# Altium PCB ROBOT_PCB.PcbDoc
Units mil, origin at the board's own origin, x right, y up, seen from the top; angles counter-clockwise.
Board outline 2089.97 x 2124.34 mil, 2 copper layers (Top Layer, Bottom Layer); 12 components, 14 nets, 101 pads, 0 vias.
Unrouted connection lines stored in the file: 3.
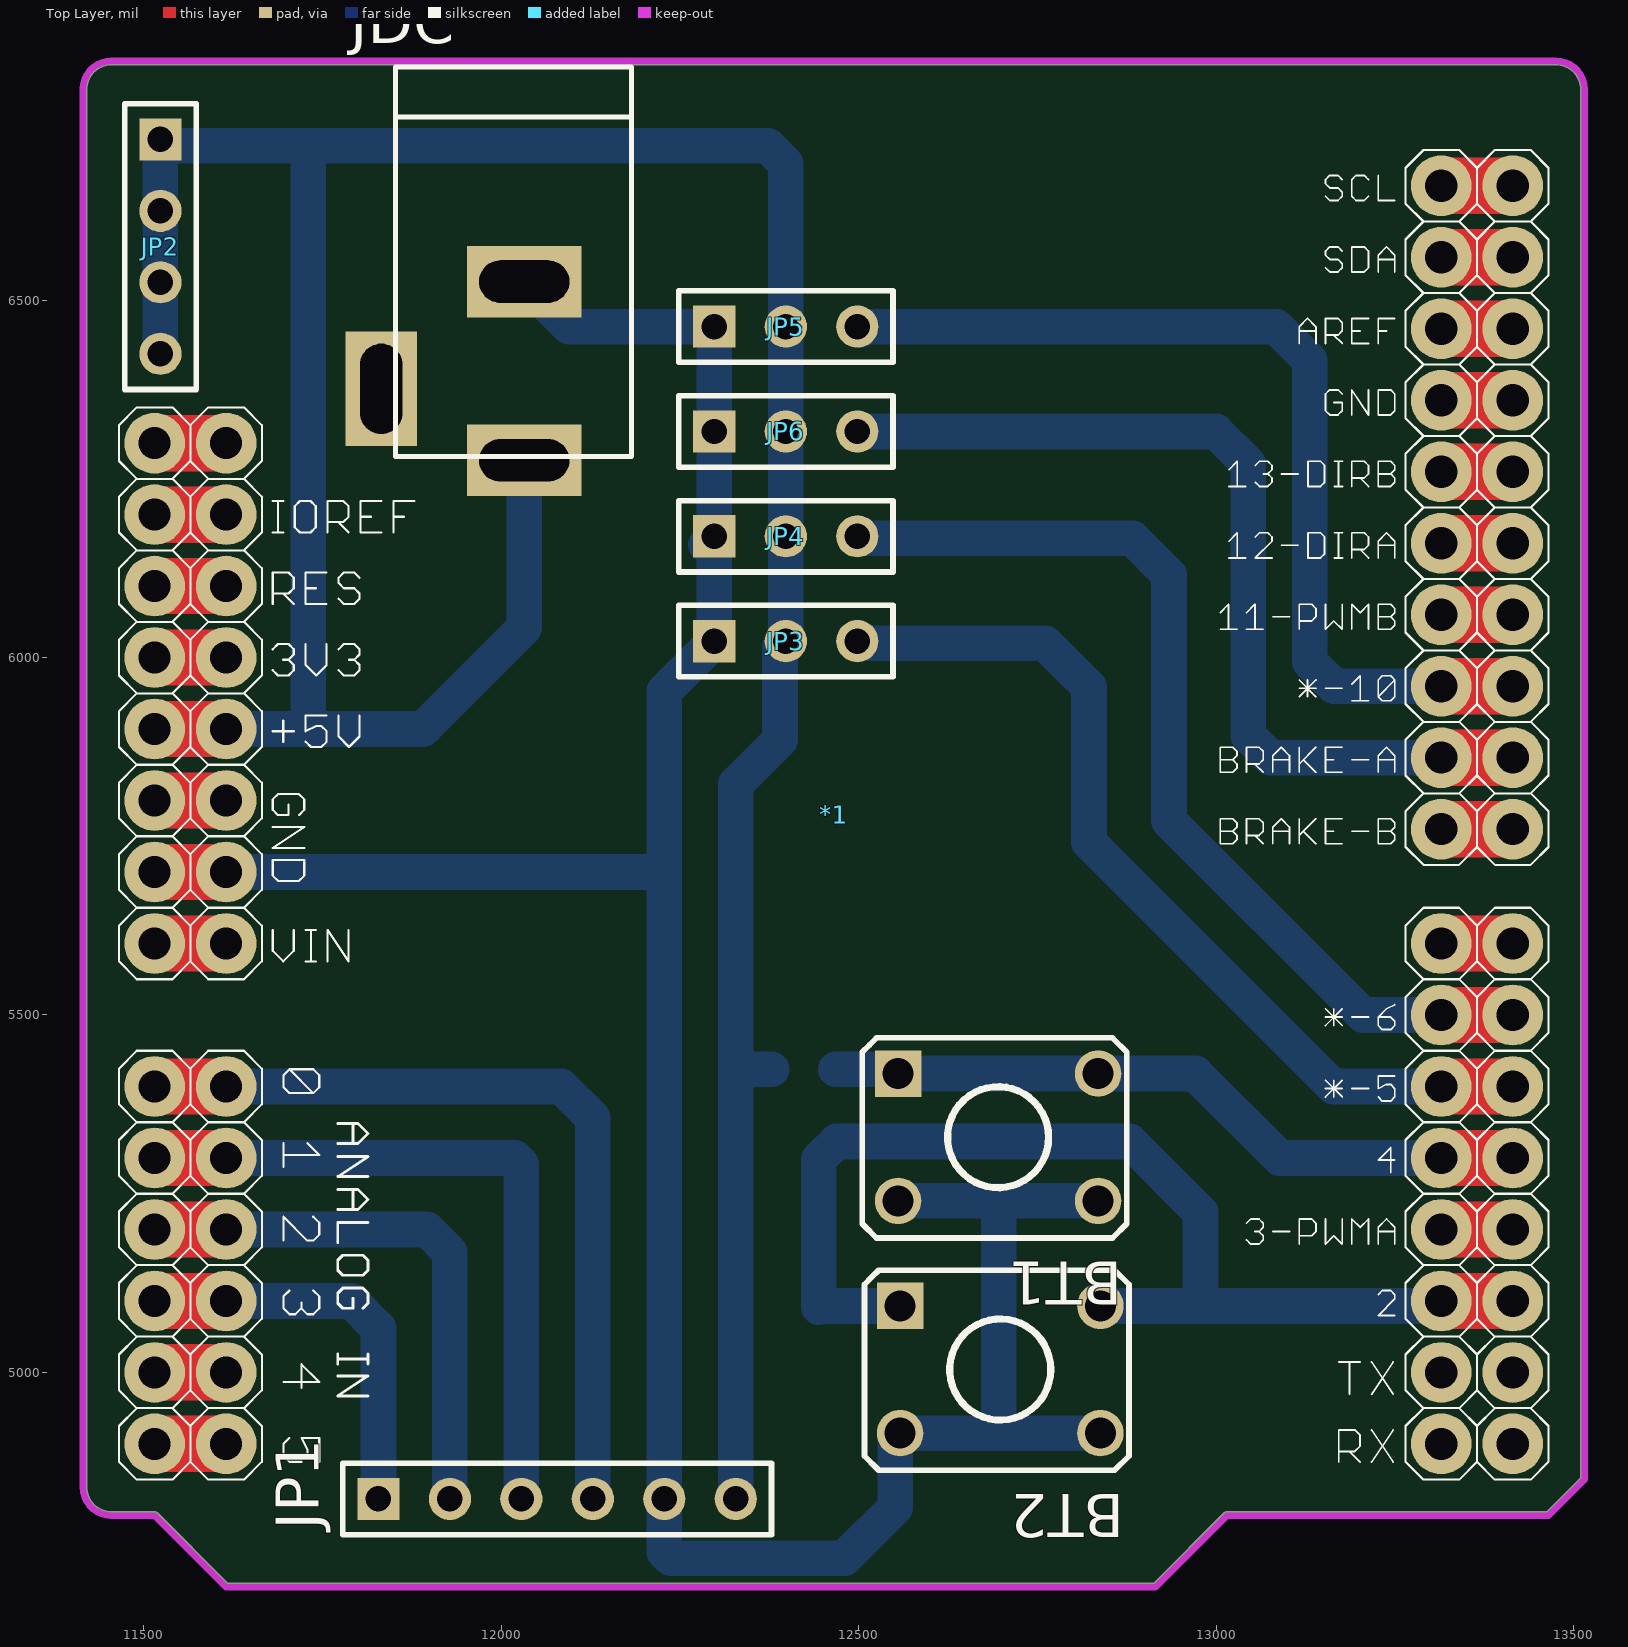
[diagram p0: Top Layer view]
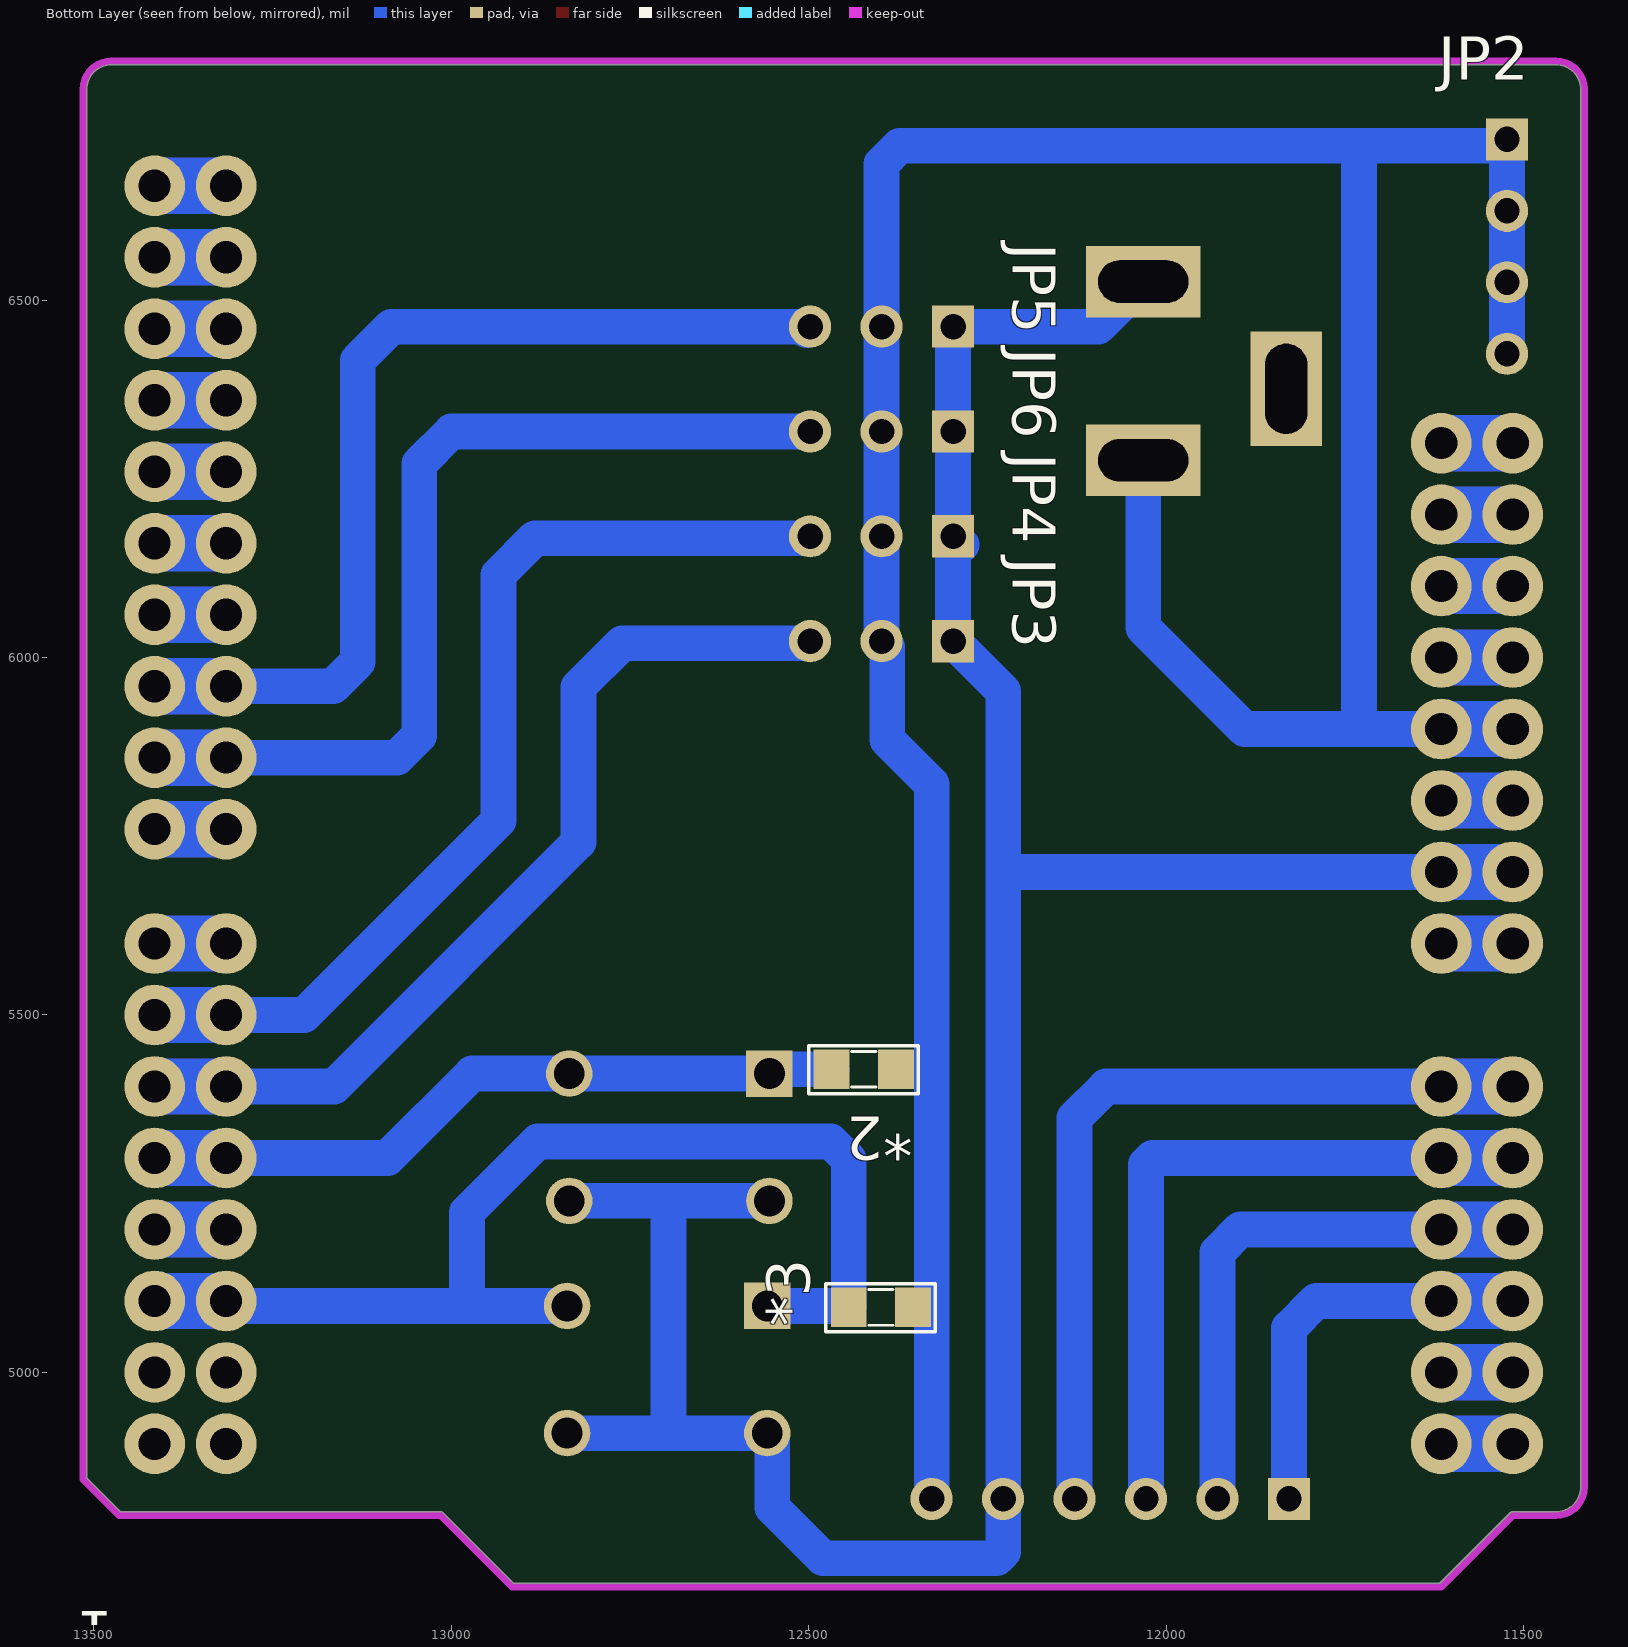
[diagram p1: Bottom Layer view, seen from below]

## Layer stack, top to bottom
Top Solder: solder mask 0.4, Solder Resist, Dk 3.5
Top Layer: signal copper 1.4
Dielectric 1: dielectric 12.6, FR-4, Dk 4.8
Bottom Layer: signal copper 1.4
Bottom Solder: solder mask 0.4, Solder Resist, Dk 3.5

## Board outline
11420.01,4839.37 ccw(c11454.37,4839.37) 11454.37,4805.02 11515,4805.02 cw(c11515,4800) 11518.56,4803.53 11518.55,4803.55 11617.08,4705.02 12912.92,4705.02 13011.45,4803.55 13011.44,4803.53 cw(c13015,4800) 13015,4805.02 13462.92,4805.02 13509.99,4852.08 13509.99,6795 ccw(c13475.63,6795) 13475.63,6829.36 11454.37,6829.36 ccw(c11454.37,6795) 11420.01,6795

## Design rules (kind name [scope] priority, off if disabled: settings)
Clearance [All] p1: gap=10 except(50: Arc-Poly Track-Poly SMDPad-Poly THPad-Poly Via-Poly Fill-Poly Poly-Poly)
PolygonConnect [All] p1: connectstyle=Relief reliefconductorwidth=10 reliefentries=4 polygonreliefangle="90 Angle" airgapwidth=10
RoomDefinition ROBOT_SCH [InComponentClass('ROBOT_SCH')] p1: confinementstyle=ConfineIn formatcopy=TRUE lockcomponents=FALSE outline 6780,1215 10035,1215 10035,3470 6780,3470
RoutingVias [All] p1: holewidth=28 width=50 viastyle="Through Hole" minholewidth=28 minwidth=50 maxholewidth=28 maxwidth=50
SolderMaskExpansion [All] p1: expansion=4
Width [All] p1: maxlimit=100 minlimit=10 preferedwidth=10
30 further rules are at their usual default settings.

## Components (designator, comment, footprint, x,y, rotation, side; value= is the part's Value field where it differs from the comment)
*1 "Arduino Uno" "ARDUINO UNO" 11515,4900 r0 top
*2 "4K7" "Tro SMD 0805" 12423,5424 r180 bottom
*3 "4K7" "Tro SMD 0805" 12399,5091 r180 bottom
BT1 "BUTTON 4P 6x6_MH" "BUTTON 4 PIN(6*6)" 12695,5329 r0 top
BT2 "BUTTON 4P 6x6_MH" "BUTTON 4 PIN(6*6)" 12698,5004 r0 top
JDC "Jac DC" DC-IN 11934,6401 r270 top
JP1 "Jump 6_MH" "Jump 6" 12078,4823 r0 top
JP2 "Jump 4_MH" "Jump 4" 11523,6575 r270 top
JP3 "Jump 3_MH" "Jump 3" 12398,6023 r0 top
JP4 "Jump 3_MH" "Jump 3" 12398,6169.67 r0 top
JP5 "Jump 3_MH" "Jump 3" 12398,6463 r0 top
JP6 "Jump 3_MH" "Jump 3" 12398,6316.33 r0 top

## Footprints (in the part's own frame and the unit in brackets; to place one, negate y for a bottom-side part, rotate by r counter-clockwise, add the part's x,y. Pads: shape width x height; smd on the part's side, far side on the other; paste and mask are expansions set on the pad)
"ARDUINO UNO" [mil]
  round 85 hole 45: 1(0,1400) 1(100,1400) 2(0,1300) 2(100,1300) 3(0,1200) 3(100,1200) 4(0,1100) 4(100,1100) 5(0,1000) 5(100,1000) 6(0,900) 6(100,900) 7(0,800) 7(100,800) 8(0,700) 8(100,700) 9(0,500) 9(100,500) 10(0,400) 10(100,400) 11(0,300) 11(100,300) 12(0,200) 12(100,200) 13(0,100) 13(100,100) 14(0,0) 14(100,0) 15(1800,0) 15(1900,0) 16(1800,100) 16(1900,100) 17(1800,200) 17(1900,200) 18(1800,300) 18(1900,300) 19(1800,400) 19(1900,400) 20(1800,500) 20(1900,500) 21(1800,600) 21(1900,600) 22(1800,700) 22(1900,700) 23(1800,860) 23(1900,860) 24(1800,960) 24(1900,960) 25(1800,1060) 25(1900,1060) 26(1800,1160) 26(1900,1160) 27(1800,1260) 27(1900,1260) 28(1800,1360) 28(1900,1360) 29(1800,1460) 29(1900,1460) 30(1800,1560) 30(1900,1560) 31(1800,1660) 31(1900,1660) 32(1800,1760) 32(1900,1760)
  Keep-Out Layer lines w10: -100,1895 cw(c-60.63,1895) -60.63,1934.37 1960.63,1934.37 cw(c1960.63,1895) 2000,1895 2000,-50 1950,-100 1500,-100 1400,-200 100,-200 0,-100 -60.63,-100 cw(c-60.63,-60.63) -100,-60.63 -100,1898
  Multi-Layer lines w78.74: 0,0 100,0 ; 0,100 100,100 ; 0,200 100,200 ; 0,300 100,300 ; 0,400 100,400 ; 0,500 100,500 ; 0,700 100,700 ; 0,800 100,800 ; 0,900 100,900 ; 0,1000 100,1000 ; 0,1100 100,1100 ; 0,1200 100,1200 ; 0,1300 100,1300 ; 0,1400 100,1400 ; 1800,200 1900,200 ; 1800,300 1900,300 ; 1800,400 1900,400 ; 1800,500 1900,500 ; 1800,600 1900,600 ; 1800,700 1900,700 ; 1800,860 1900,860 ; 1800,960 1900,960 ; 1800,1060 1900,1060 ; 1800,1160 1900,1160 ; 1800,1260 1900,1260 ; 1800,1360 1900,1360 ; 1800,1460 1900,1460 ; 1800,1560 1900,1560 ; 1800,1660 1900,1660 ; 1800,1760 1900,1760
  silkscreen extent -50,-50 1950,1810
"BUTTON 4 PIN(6*6)" [mil] "BUTTON SMORE 280mil x 178mil"
  rect 65x65 hole 43.31: 1(-140,89)
  round 65 hole 43.31: 1(140,89) 2(-140,-89) 2(140,-89)
  silkscreen extent -190,-141 180,139, body extent -159,-124 153,120, height 276
DC-IN [mil]
  rect 100x160 hole 59.06 slot 125.98 at 90 deg: 1(125,98) 2(-125,98)
  rect 160x100 hole 59.06 slot 125.98 at 0 deg: 3(25,-102)
  silkscreen extent -425,-82 120,248, body extent -410,-107 134,267, height 434
"Jump 3" [mm] "Jump 3P 2.54"
  rect 1.5x1.5 hole 0.9: 1(-2.54,0)
  round 1.5 hole 0.9: 2(0,0) 3(2.54,0)
  silkscreen extent -3.81,-1.27 3.81,1.27, body extent -3.81,-1.27 3.81,1.27, height 7
"Jump 4" [mm]
  rect 1.5x1.5 hole 0.9: 1(-3.81,0)
  round 1.5 hole 0.9: 2(-1.27,0) 3(1.27,0) 4(3.81,0)
  silkscreen extent -5.08,-1.27 5.08,1.27, body extent -5.08,-1.27 5.08,1.27, height 7
"Jump 6" [mm]
  rect 1.5x1.5 hole 0.9: 1(-6.35,0)
  round 1.5 hole 0.9: 2(-3.81,0) 3(-1.27,0) 4(1.27,0) 5(3.81,0) 6(6.35,0)
  silkscreen extent -7.62,-1.27 7.62,1.27, body extent -7.62,-1.27 7.62,1.27, height 7
"Tro SMD 0805" [mil]
  rect 50x55 smd: 1(-45,0) 2(45,0)
  silkscreen extent -77,-34 76,33, body extent -62,-28 56,27, height 21

## Part data
*2 *3: library part TRO_SMD_0805_MH, "TRO_SMD_0805"
BT1 BT2: "Nút nh?n 4 chân, 6x6mm, c?m"
JDC: library part JAC_DC_MH, "Jac DC input"
JP1: "Jump 6P 2.54"
JP2: "Jump 4P 2.54"
JP3 JP4 JP5 JP6: "Jump 3P 2.54"

## Nets (pads, with @x,y where several pads share a name; then routed paths per layer and width w, separated by ;. In a path a pad name is that pad's centre, name@x,y a point inside that pad or via, vN(x,y) a via of type N, cw(c..) or ccw(c..) an arc to the next point about the centre after c; other vN are vias at no path point)
A1: *1.9 JP1.4 | length 1064.2
  Bottom Layer w50: *1.9@11615,5400 12084,5400 12128,5356 JP1.4
A2: *1.10 JP1.3 | length 884.7
  Bottom Layer w50: *1.10@11615,5300 12019,5300 12028,5291 JP1.3
A3: *1.11 JP1.2 | length 671.3
  Bottom Layer w50: *1.11@11615,5200 11896,5200 11928,5168 JP1.2
A4: *1.12 JP1.1 | length 467.7
  Bottom Layer w50: *1.12@11615,5100 11790,5100 11828,5062 JP1.1
GND: *1.6 *1.7 BT1.2 BT2.2 JDC.2 JP1.5 JP3.1 JP4.1 JP5.1 JP6.1 | length 4014.7
  Bottom Layer w50: *1.7@11615,5700 12228,5700 ; JDC.2 12095,6463 JP5.1 JP6.1 JP4.1 ; JP4.1@12286.33,6158 JP4.1 ; BT1.2@12555,5240 12696,5240 ; BT1.2@12835,5240 12696,5240 ; BT2.2@12838,4915 12691,4915 ; 12228,5700 JP1.5 12228,4749 12237,4740 12480,4740 12551,4811 12551,4908 12558,4915 12691,4915 ; 12228,5700 12228,5953 JP3.1 JP4.1 ; 12691,4915 12696,4920 12696,5240
Net*1_17: *1.17 *3.1 BT2.1 | length 1519.3
  Bottom Layer w50: *3.1 *3.1@12444,5098 ; BT2.1@12558,5093 12449,5093 *3.1@12444,5098 ; BT2.1@12838,5093 12978,5093 ; *1.17@13315,5100 13308,5093 12978,5093 ; *3.1@12444,5098 12444,5298 12469,5323 12879,5323 12978,5224 12978,5093
Net*1_19: *1.19 *2.1 BT1.1 | length 898.4
  Bottom Layer w50: *2.1 12549,5424 12555,5418 12835,5418 12971,5418 13089,5300 *1.19@13315,5300
PWM1: *1.20 JP3.3 | length 1202.2
  Bottom Layer w50: JP3.3 12501,6020 12761,6020 12822,5959 12822,5742 13164,5400 *1.20@13315,5400
PWM2: *1.21 JP4.3 | length 1295.9
  Bottom Layer w50: JP4.3 12500.67,6167 12883,6167 12934,6116 12934,5772 13206,5500 *1.21@13315,5500
PWM3: *1.24 JP6.3 | length 1228.6
  Bottom Layer w50: JP6.3 12999.67,6316.33 13045,6271 13045,5891 13076,5860 *1.24@13315,5860
PWM4: *1.25 JP5.3 | length 1279.6
  Bottom Layer w50: JP5.3@12503,6458 JP5.3 13084,6463 13131,6416 13131,5994 13165,5960 *1.25@13315,5960
RX: *1.15
TX: *1.16
VCC: *1.5 *2.2 *3.2 JDC.1 JP1.6 JP2.1 JP2.2 JP2.3 JP2.4 JP3.2 JP4.2 JP5.2 JP6.2 | length 4664.4
  Bottom Layer w50: JP2.4 JP2.3 JP2.2 JP2.1 11532,6716 11733,6716 ; *1.5@11615,5900 11730,5900 ; JDC.1 12032,6042 11890,5900 11730,5900 ; JP1.6 12328,5421 ; *2.2 12331,5424 12328,5421 ; 11730,5900 11730,6713 11733,6716 ; 11733,6716 12373,6716 12398,6691 JP5.2 JP6.2 JP4.2 JP3.2 12390,6015 12390,5885 12328,5823 12328,5421
pads on no net: *1.1 *1.2 *1.3 *1.4 *1.8 *1.13 *1.14 *1.18 *1.22 *1.23 *1.26 *1.27 *1.28 *1.29 *1.30 *1.31 *1.32 JDC.3